# Altium PCB TheBetterArduinoBoard.PcbDoc
Units mm, origin at the board's own origin, x right, y up, seen from the top; angles counter-clockwise.
Board outline 92.5 x 45 mm, 2 copper layers (Top Layer, Bottom Layer), stack 1.569 mm thick; 56 components, 48 nets, 221 pads, 910 vias.
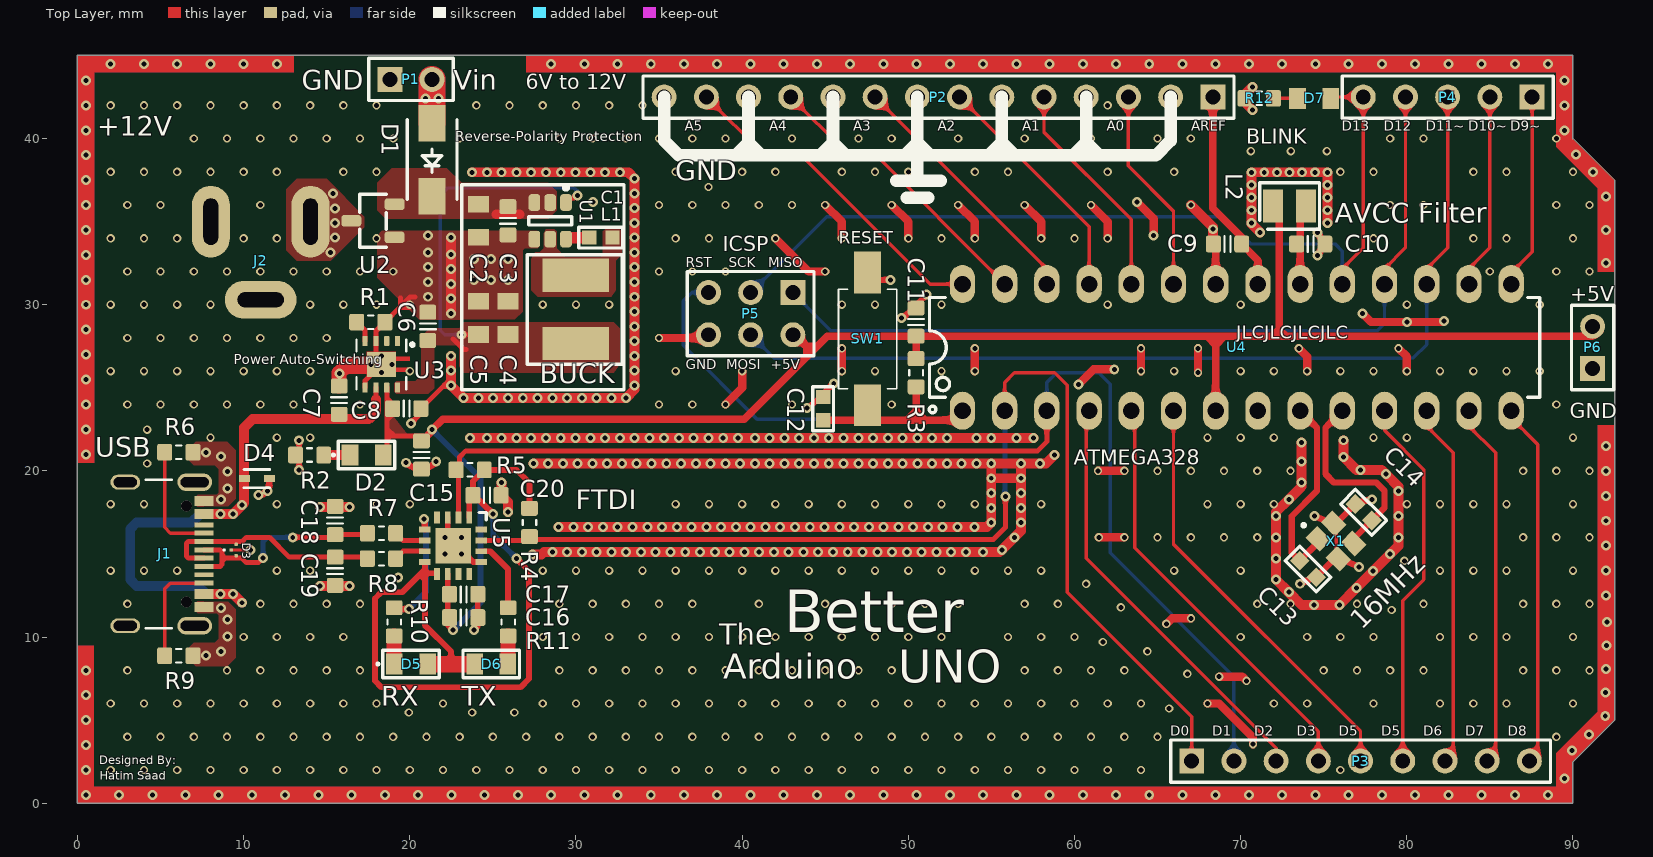
[diagram p0: Top Layer view]
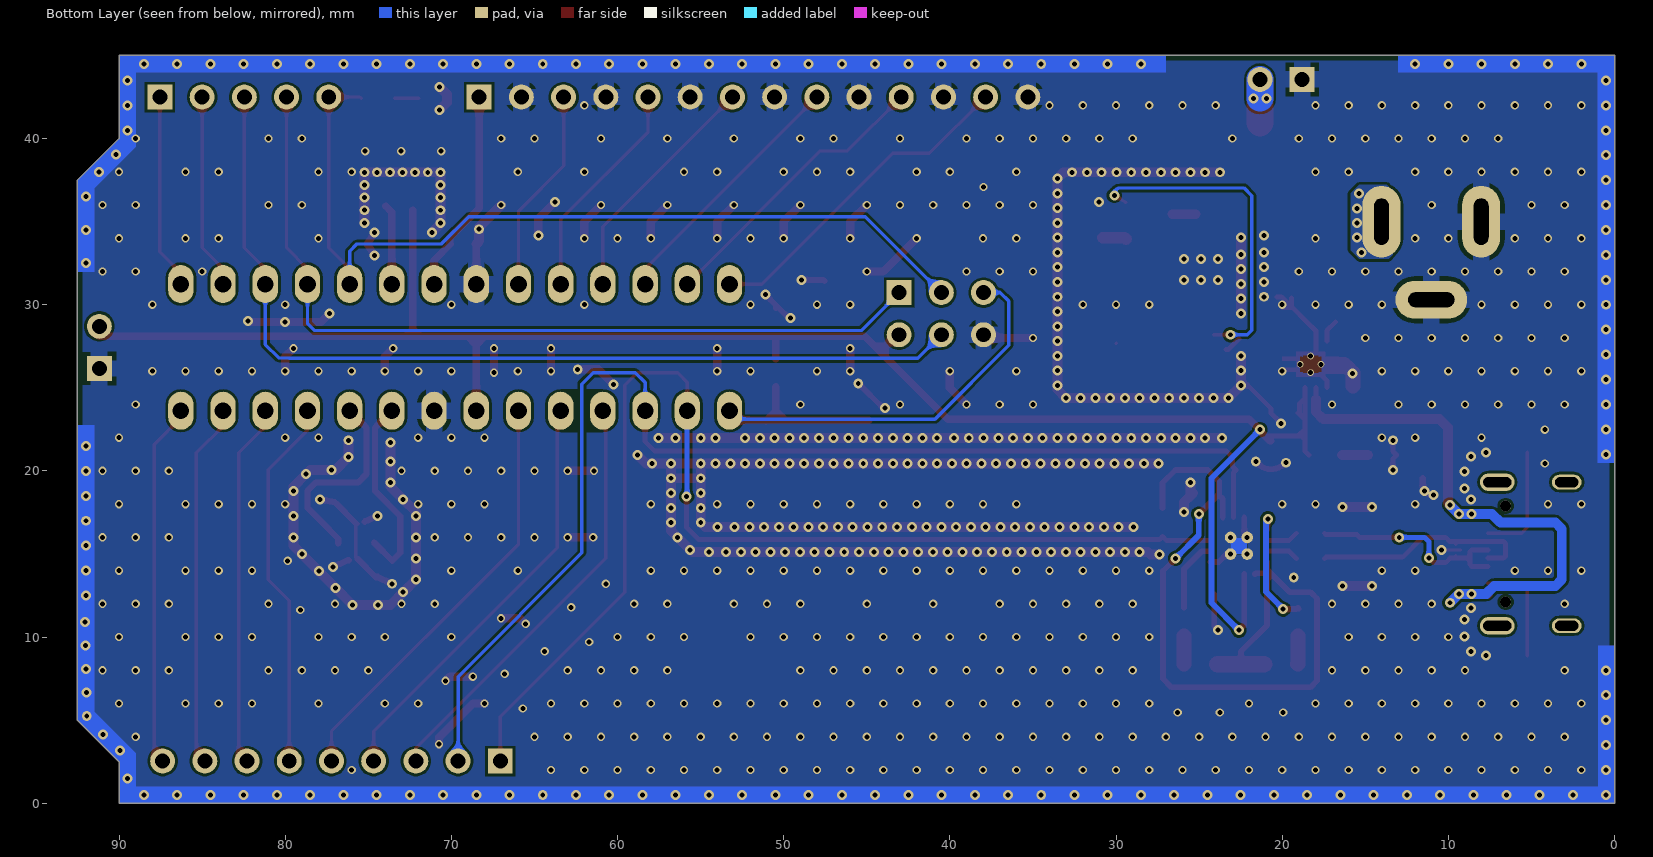
[diagram p1: Bottom Layer view, seen from below]
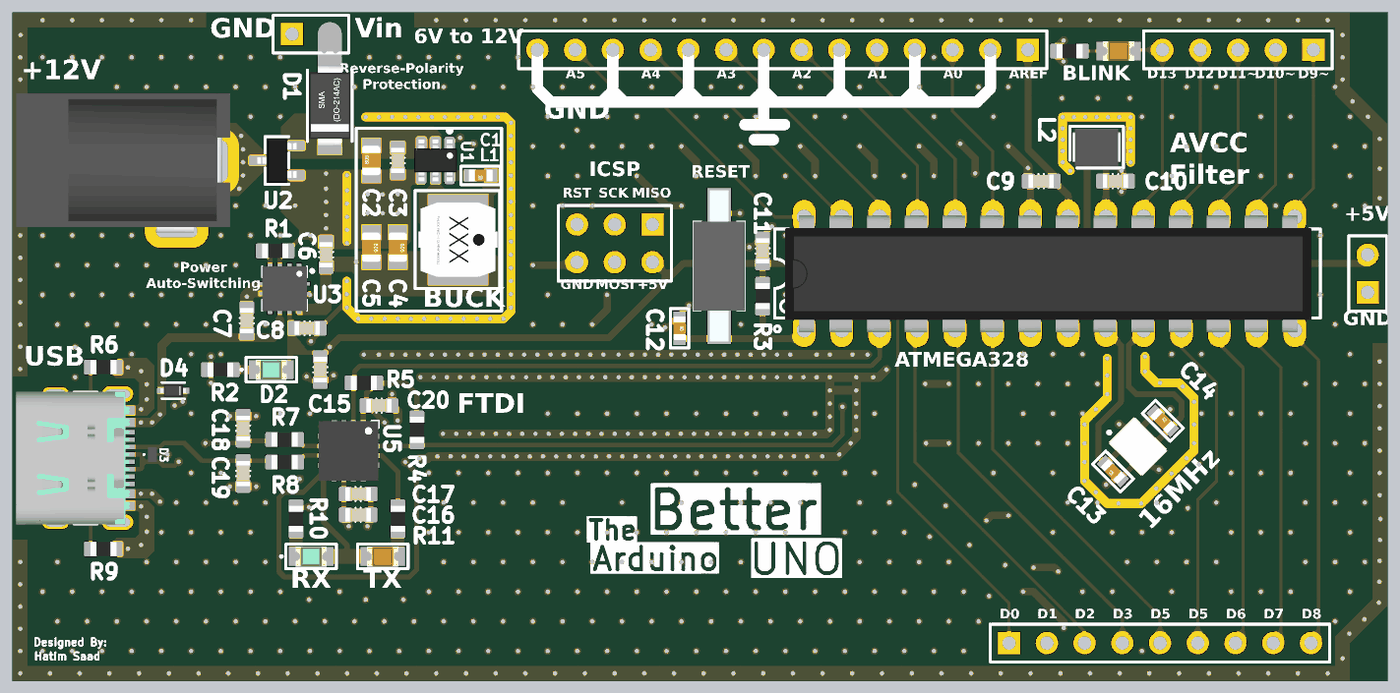
[diagram p2: 3D render of the assembled board from above, using the file's embedded part models]

## Layer stack, top to bottom
Top Solder: solder mask 0.0254, SM-001, Dk 4
Top Layer: signal copper 0.035
Dielectric 1: core 1.4986, Core-043, Dk 4.3
Bottom Layer: signal copper 0.035
Bottom Solder: solder mask 0.0254, SM-001, Dk 4

## Board outline
90,0 90,2.5 92.5,5 92.5,37.5 90,40 90,45 0,45 0,0

## Design rules (kind name [scope] priority, off if disabled: settings)
BoardOutlineClearance [All] p1: gap=0.3 ignorepadtopadclearanceinfootprint=FALSE
Clearance [All] p1: gap=0.3 ignorepadtopadclearanceinfootprint=TRUE except(0.127: Arc-Arc Arc-Track Track-Track SMDPad-SMDPad; 0.152: Arc-SMDPad Arc-THPad Arc-Poly Track-SMDPad Track-THPad Track-Poly SMDPad-Poly THPad-Poly Via-Fill Via-Poly Fill-Poly Poly-Poly Poly-Region Poly-Text Poly-Hole; 0.254: Arc-Via Track-Via Via-Via; 0.5: THPad-THPad)
DiffPairsRouting [All] p1: maxlimit=0.254 minlimit=0.127 mostfreqgap=0.254 toplayer_minwidth=0.127 toplayer_maxwidth=0.381 toplayer_prefwidth=0.381 bottomlayer_minwidth=0.127 bottomlayer_maxwidth=0.381 bottomlayer_prefwidth=0.381 maxuncoupledlength=12.7
FabricationTestpoint [All] p1: side=3 testpointundercomponent=TRUE minsize=1.016 maxsize=2.54 preferedsize=1.524 minholesize=0 maxholesize=1.016 preferedholesize=0.813 testpointgrid=0.025 allowsidetop=TRUE allowsidebottom=TRUE usegrid=TRUE gridtolerance=0 boardedgeclearance=0.3
Height [All] p1: minheight=0 maxheight=50 prefheight=12.7
HoleSize [All] p1: absolutevalues=TRUE maxlimit=6.3 minlimit=0.3 maxpercent=80.000 minpercent=20.000
PolygonConnect [All] p1: thpad.connectstyle=Relief thpad.reliefconductorwidth=1.016 thpad.reliefentries=4 thpad.polygonreliefangle="90 Angle" thpad.airgapwidth=0.254 smdpad.connectstyle=Relief smdpad.reliefconductorwidth=0.254 smdpad.reliefentries=4 smdpad.polygonreliefangle="90 Angle" smdpad.airgapwidth=0.254 via.connectstyle=Direct via.reliefconductorwidth=0.254 via.reliefentries=4 via.polygonreliefangle="90 Angle" via.airgapwidth=0.254
RoutingVias [All] p1: holewidth=0.711 width=1.27 viastyle="Through Hole" minholewidth=0.3 minwidth=0.5 maxholewidth=0.711 maxwidth=1.27
SolderMaskExpansion [All] p1: expansion=0.05 istentingtop=FALSE useseparateexpansions=TRUE expansionbottom=0.05 istentingbottom=FALSE
UnRoutedNet [All] p1: checkbadconnections=TRUE
Width [All] p1: maxlimit=15 minlimit=0.127 preferedwidth=0.254
25 further rules are at their usual default settings.

## Classes and differential pairs
component class Connectors_USB: C15 C16 C17 C18 C19 C20 D3 D4 D5 D6 J1 J2 P1 P2 P3 P4 P5 P6 R4 R5 R6 R7 R8 R9 R10 R11 U5
component class Power: C1 C2 C3 C4 C5 C6 C7 C8 D1 D2 L1 R1 R2 U1 U2 U3
component class Main: C9 C10 C11 C12 C13 C14 D7 L2 R3 R12 SW1 U4 X1
differential pair XTAL: +XTAL_P -XTAL_N
differential pair D: +D_P -D_N

## Components (designator, comment, footprint, x,y, rotation, side; value= is the part's Value field where it differs from the comment)
C1 "0.1UF" "CAP: 0603" 31.496,34.036 r180 top
C2 "10UF" "CAP: 0805" 24.13,35.052 r90 top
C3 "0.1UF" CAPC1608X90N#1 25.908,35.052 r90 top
C4 "22UF" "CAP: 0805" 25.908,29.21 r270 top
C5 "22UF" "CAP: 0805" 24.13,29.21 r270 top
C6 "0.1UF" CAPC1608X90N#2 21.082,28.702 r270 top
C7 "0.1UF" CAPC1608X90N#1 15.748,24.257 r270 top
C8 "0.1UF" CAPC1608X90N#2 19.812,23.749 r180 top
C9 "0.1UF" CAPC1608X90N#1 69.215,33.655 r180 top
C10 "0.1UF" CAPC1608X90N#1 74.215,33.655 r0 top
C11 "0.1UF" CAPC1608X90N#1 50.466,28.956 r90 top
C12 "0.1UF" "CAP: 0603" 44.878,23.749 r270 top
C13 "8PF" "CAP: 0603" 74.05,14.097 r135 top
C14 "8PF" "CAP: 0603" 77.403,17.513 r315 top
C15 "4.7UF" CAPC1608X90N#1 20.701,20.955 r90 top
C16 "100nF" CAPC1608X90N#1 23.241,11.176 r180 top
C17 "10nF" CAPC1608X90N#1 23.241,12.573 r180 top
C18 "47pF" CAPC1608X90N#1 15.502,17.01 r270 top
C19 "47pF" CAPC1608X90N#1 15.502,13.962 r90 top
C20 "100nF" CAPC1608X90N#1 24.646,18.534 r180 top
D1 "B340AQ-13-F" DO-214AC 21.336,38.735 r90 top
D2 "GREEN" "LED: 0805G" 17.399,20.955 r0 top
D3 "ESD122DMXR" "3-X2SON (1x0.6)" 9.398,15.24 r0 top
D4 "TPD1E10B06DYARQ1" SOD-523 10.795,19.558 r0 top
D5 "GREEN" "LED: 0805G" 20.074,8.374 r0 top
D6 "RED" "LED: 0805R" 24.9,8.374 r180 top
D7 "Yellow" "LED: 0805Y" 74.422,42.418 r0 top
J1 "12402012E212A" AMPHENOL_12402012E212A 2.875,15 r270 top
J2 "DCJ200-10-A-K1-K" "DC JACK" 14.025,35 r90 top
L1 "4.7UH" "IND: VLS5045EX-4R7M-H" 29.972,29.718 r270 top
L2 "10UH" "IND: 1210" 72.945,35.941 r180 top
P1 "Header 2" HDR1X2 18.796,43.561 r0 top
P2 "Header 14" HDR1X14 68.326,42.5 r180 top
P3 "Header 9" HDR1X9 67.056,2.54 r0 top
P4 "Header 5" HDR1X5 87.54,42.5 r180 top
P5 "Header 3X2" HDR2X3 43.053,30.734 r180 top
P6 "Header 2" HDR1X2 91.186,26.162 r90 top
R1 "240" RESC1608X55N 17.653,28.956 r180 top
R2 "470" RESC1608X55N 13.97,20.955 r0 top
R3 "10K" RESC1608X55N 50.466,25.908 r90 top
R4 "10k" RESC1608X55N 27.2,16.899 r90 top
R5 "10k" RESC1608X55N 23.63,20.058 r0 top
R6 "5.1K" RESC1608X55N 6.096,21.124 r0 top
R7 "27" RESC1608X55N 18.296,16.248 r0 top
R8 "27" RESC1608X55N 18.296,14.724 r0 top
R9 "5.1K" RESC1608X55N 6.096,8.876 r0 top
R10 "220" RESC1608X55N 19.058,10.914 r270 top
R11 "220" RESC1608X55N 25.916,10.914 r270 top
R12 "470" RESC1608X55N 71.12,42.418 r0 top
SW1 "SPST" MJTP1106STRB 47.545,27.94 r270 top
U1 "AP63205WU-7" TSOT23-6 28.448,35.052 r270 top
U2 "PMV28XPEAR" SOT23_3 17.78,35.052 r180 top
U3 "TPS2115ADRBR" "8-SON (3x3)" 18.288,26.416 r270 top
U4 "ATMEGA328-PU" dip_28 69.77,27.432 r90 top
U5 "FT230XQ-R" "16-QFN (4x4)" 22.606,15.494 r270 top
X1 "16MHz" "4-SMD, No Lead" 75.739,15.773 r315 top

## Footprints (in the part's own frame and the unit in brackets; to place one, negate y for a bottom-side part, rotate by r counter-clockwise, add the part's x,y. Pads: shape width x height; smd on the part's side, far side on the other; paste and mask are expansions set on the pad)
"3-X2SON (1x0.6)" [mm]
  rrect50% 0.2x0.2 smd paste-1 mask+0.05: 1(-0.15,0) 2(0.15,-0.34) 3(0.15,0.34)
  silkscreen extent -0.62,-0.05 -0.52,0.05, body extent -0.3,-0.5 0.3,0.5, height 0.4
"4-SMD, No Lead" [mm]
  rect 1.2x1 smd mask+0.05: 1(-0.85,-0.65) 2(0.85,-0.65) 3(0.85,0.65) 4(-0.85,0.65)
  silkscreen extent -2.15,-0.8 -1.95,-0.6, body extent -1.6,-1.25 1.6,1.25, height 0.8
"8-SON (3x3)" [mm]
  rrect25% 0.6x0.31 smd mask+0.05: 1(-1.4,0.975) 2(-1.4,0.325) 3(-1.4,-0.325) 4(-1.4,-0.975) 5(1.4,-0.975) 6(1.4,-0.325) 7(1.4,0.325) 8(1.4,0.975)
  round 0.4 hole 0.3 mask+0.05: 9(-0.5,0) 9(0,0.625) 9(0,-0.625) 9(0.5,0)
  rect 1.5x1.75 smd paste-2 mask+0.05: 9(0,0)
  Top Layer region: 0.44,0.875 0.75,0.875 0.75,-0.875 0.44,-0.875 0.44,-1.7 0.21,-1.7 0.21,-0.875 -0.21,-0.875 -0.21,-1.7 -0.44,-1.7 -0.44,-0.875 -0.75,-0.875 -0.75,0.875 -0.44,0.875 -0.44,1.7 -0.21,1.7 -0.21,0.875 0.21,0.875 0.21,1.7 0.44,1.7
  silkscreen extent -1.5,-1.5 1.5,1.96, body extent -1.5,-1.5 1.5,1.5, height 1
"16-QFN (4x4)" [mm] "4x4 mm, pitch 0.65 mm"
  round 0.7 hole 0.3 mask+0.05: 0(-0.5,0.5) 0(-0.5,-0.5) 0(0.5,0.5) 0(0.5,-0.5)
  rect 2.15x2.15 smd mask+0.05: 0(0,0)
  rect 0.7x0.35 smd mask+0.05: 1(-1.7,0.975) 2(-1.7,0.325) 3(-1.7,-0.325) 4(-1.7,-0.975) 9(1.7,-0.975) 10(1.7,-0.325) 11(1.7,0.325) 12(1.7,0.975)
  rect 0.35x0.7 smd mask+0.05: 5(-0.975,-1.7) 6(-0.325,-1.7) 7(0.325,-1.7) 8(0.975,-1.7) 13(0.975,1.7) 14(0.325,1.7) 15(-0.325,1.7) 16(-0.975,1.7)
  round 0.5 on Mech1 mask+0.05: ""(-1.5,1.6)
  silkscreen extent -2,1.57 -1.57,2, body extent -2,-2 2,2, height 0.75
AMPHENOL_12402012E212A [mm]
  rect 0.6x1.14 smd mask+0.05: A1_B12(-3.2,4.75) A4_B9(-2.4,4.75) B1_A12(3.2,4.75) B4_A9(2.4,4.75)
  rect 0.3x1.14 smd mask+0.05: A5(-1.25,4.75) A6(-0.25,4.75) A7(0.25,4.75) A8(1.25,4.75) B5(1.75,4.75) B6(0.75,4.75) B7(-0.75,4.75) B8(-1.75,4.75)
  oval 1.05x2.1 hole 0.6 slot 1.7 at 90 deg: SH1(-4.32,4.18) SH2(4.32,4.18)
  oval 0.9x1.8 hole 0.6 slot 1.4 at 90 deg: SH3(-4.32,0) SH4(4.32,0)
  round 0.65 hole 0.65 unplated mask+0.05: ""(-2.89,3.68) ""(2.89,3.68)
  silkscreen extent -4.47,1.22 4.47,2.81, body extent -4.47,-2.65 4.47,4.95, height 3.23
"CAP: 0603" [mm]
  rect 0.85x0.85 smd mask+0.05: 1(-0.7,0) 2(0.7,0)
  silkscreen extent -1.33,-0.63 1.33,0.63, body extent -0.8,-0.4 0.8,0.4, height 0.3
"CAP: 0805" [mm]
  rect 1x1.25 smd mask+0.05: 1(-1,0) 2(1,0)
  body extent -1,-0.62 1,0.63, height 0.78
CAPC1608X90N#1 [mm] "Chip Capacitor, Body 1.6x0.8mm, EIA 0603, IPC Medium Density"
  rrect25% 0.9x1 smd mask+0.05: 1(-0.85,0) 2(0.85,0)
  Top Layer pour cut-out: -0.6,0.5 -0.4,0.7 0.4,0.7 0.6,0.5 0.6,-0.5 0.4,-0.7 -0.4,-0.7 -0.6,-0.5
  silkscreen extent -0.18,-0.48 0.18,0.48, body extent -0.85,-0.45 0.85,0.45, height 0.89
CAPC1608X90N#2 [mm] "Chip Capacitor, Body 1.6x0.8mm, EIA 0603, IPC Medium Density"
  rrect25% 0.9x1 smd mask+0.05: 1(-0.85,0) 2(0.85,0)
  silkscreen extent -0.18,-0.48 0.18,0.48, body extent -0.85,-0.45 0.85,0.45, height 0.89
"DC JACK" [mil]
  oval 170x90 hole 35 slot 110 at 0 deg: 1(0,0) 2(0,236.22)
  oval 90x170 hole 35 slot 110 at 90 deg: 3(-185.04,118.11)
  body extent -190,-24 180,543, height 447
dip_28 [mil]
  oval 90x60 hole 39.37: 1(-150,650) 2(-150,550) 3(-150,450) 4(-150,350) 5(-150,250) 6(-150,150) 7(-150,50) 8(-150,-50) 9(-150,-150) 10(-150,-250) 11(-150,-350) 12(-150,-450) 13(-150,-550) 14(-150,-650) 15(150,-650) 16(150,-550) 17(150,-450) 18(150,-350) 19(150,-250) 20(150,-150) 21(150,-50) 22(150,50) 23(150,150) 24(150,250) 25(150,350) 26(150,450) 27(150,550) 28(150,650)
  silkscreen extent -155,-718 118,729, body extent -156,-694 154,700, height 205
DO-214AC [mm]
  rect 2.2x1.6 smd mask+0.05: 1(2.2,0) 2(-2.2,0)
  silkscreen extent -2.4,-1.5 2.4,1.5, body extent -2.75,-1.4 2.75,1.4, height 2.6
HDR1X2 [mm] "Connector; Header; 2 Position"
  rect 1.5x1.5 hole 0.9: 1(0,0)
  round 1.5 hole 0.9: 2(2.54,0)
  silkscreen extent -1.27,-1.27 3.81,1.27
HDR1X5 [mm] "Connector; Header; 5 Position"
  rect 1.5x1.5 hole 0.9: 1(0,0)
  round 1.5 hole 0.9: 2(2.54,0) 3(5.08,0) 4(7.62,0) 5(10.16,0)
  silkscreen extent -1.27,-1.27 11.43,1.27
HDR1X9 [mm] "Connector; Header; 9 Position"
  rect 1.5x1.5 hole 0.9: 1(0,0)
  round 1.5 hole 0.9: 2(2.54,0) 3(5.08,0) 4(7.62,0) 5(10.16,0) 6(12.7,0) 7(15.24,0) 8(17.78,0) 9(20.32,0)
  silkscreen extent -1.27,-1.27 21.59,1.27
HDR1X14 [mm] "Connector; Header; 14 Position"
  rect 1.5x1.5 hole 0.9: 1(0,0)
  round 1.5 hole 0.9: 2(2.54,0) 3(5.08,0) 4(7.62,0) 5(10.16,0) 6(12.7,0) 7(15.24,0) 8(17.78,0) 9(20.32,0) 10(22.86,0) 11(25.4,0) 12(27.94,0) 13(30.48,0) 14(33.02,0)
  silkscreen extent -1.27,-1.27 34.29,1.27
HDR2X3 [mm] "Connector; Header; 3x2 Position"
  rect 1.5x1.5 hole 0.9: 1(0,0)
  round 1.5 hole 0.9: 2(0,2.54) 3(2.54,0) 4(2.54,2.54) 5(5.08,0) 6(5.08,2.54)
  silkscreen extent -1.27,-1.27 6.35,3.81
"IND: 1210" [mm]
  rect 1.2x2 smd mask+0.05: 1(-1,0) 2(1,0)
  silkscreen extent -1.8,-1.39 1.8,1.4, body extent -1.6,-1.25 1.6,1.25, height 2.4
"IND: VLS5045EX-4R7M-H" [mm]
  rect 2x4 smd mask+0.05: 1(-2.05,0) 2(2.05,0)
  silkscreen extent -3.3,-2.9 3.3,2.8, body extent -2.49,-2.66 2.51,2.64, height 4.35
"LED: 0805G" [mm]
  rect 1x1.25 smd mask+0.05: 1(-1,0) 2(1,0)
  silkscreen extent -2.03,-0.82 1.7,0.82, body extent -1.05,-0.67 1.05,0.68, height 0.9
"LED: 0805R" [mm]
  rect 1x1.25 smd mask+0.05: 1(-1,0) 2(1,0)
  silkscreen extent -1.7,-0.82 1.7,0.82, body extent -1.05,-0.67 1.05,0.68, height 0.9
"LED: 0805Y" [mm]
  rect 1x1.25 smd mask+0.05: 1(-1,0) 2(1,0)
  body extent -1.05,-0.67 1.05,0.68, height 0.9
MJTP1106STRB [mm]
  rect 2.5x1.6 smd mask+0.05: 1(-4,0) 2(4,0)
  silkscreen extent -3,-1.75 3,1.75, body extent -5.09,-1.75 5.09,1.75, height 4.4
RESC1608X55N [mm] "Chip Resistor, Body 1.6x0.8mm, EIA 0603, IPC Medium Density"
  rrect25% 0.9x1 smd mask+0.05: 1(-0.85,0) 2(0.85,0)
  Top Layer pour cut-out: -0.6,0.5 -0.4,0.7 0.4,0.7 0.6,0.5 0.6,-0.5 0.4,-0.7 -0.4,-0.7 -0.6,-0.5
  silkscreen extent -0.15,-0.41 0.15,0.41, body extent -0.87,-0.47 0.88,0.48, height 0.54
SOD-523 [mm]
  rect 0.67x0.4 smd paste+0 mask+0.05: 1(-0.749,-0.019) 2(0.749,-0.019)
  silkscreen extent -0.77,-0.57 0.77,0.53, body extent -0.85,-0.44 0.85,0.4, height 0.77
SOT23_3 [mm]
  rrect50% 1.2x0.7 smd mask+0.05: 1(-1.3,1) 2(-1.3,-1) 3(1.3,0)
  silkscreen extent -0.8,-1.6 0.8,1.6, body extent -1.32,-1.5 1.32,1.5, height 1.08
TSOT23-6 [mm] "pitch 0.95 mm"
  rrect50% 1x0.7 smd mask+0.05: 1(-1.099,0.95) 2(-1.099,0) 3(-1.099,-0.95) 4(1.099,-0.95) 5(1.099,0) 6(1.099,0.95)
  round 0.5 on Mech1 mask+0.05: ""(-1,1.1)
  silkscreen extent -2.12,-1.3 0.25,1.3, body extent -1.4,-1.45 1.4,1.45, height 1.45

## Part data
C1: library part CL10B104KB8NNNL, "CAP CER 0.1UF 50V X7R 0603", Supplier Part Number 1=187-CL10B104KB8NNNL, Supplier 1=Mouser
C2: library part GRM21BR61H106KE43L, "CAP CER 10UF 50V X5R 0805", Supplier Part Number 1=81-GRM21BR61H106KE3L, Supplier 1=Mouser
C3 C6 C7 C8 C9 C10 C11 C12: library part CC0603KRX7R9BB104, "CAP CER 0.1UF 50V 10% X7R 0603", Supplier Part Number 1=311-1344-1-ND, Supplier 1=Digi-Key
C4 C5: library part CL21A226MAYNNNE, "CAP CER 22UF 25V X5R 0805", Supplier Part Number 1=187-CL21A226MAYNNNE, Supplier 1=Mouser
C13 C14: library part CC0603DRNPO9BN8R0, "CAP CER 8PF 50V C0G/NPO 0603", Supplier Part Number 1=603-CC603DRNPO9BN8R0, Supplier 1=Mouser
C15: library part 1276-1903-6-ND, "CAP CER 4.7UF 25V X5R 0603", Supplier Part Number 1=1276-1903-1-ND, Supplier 1=Digi-Key
C16 C20: library part C14663, "CAP CER 0.1UF 50V 10% X7R 0603"
C17: library part 1292-1386-6-ND, "CAP CER 10000PF 50V X7R 0603", Supplier Part Number 1=1292-1386-1-ND, Supplier 1=Digi-Key
C18 C19: library part 311-3899-6-ND, "CAP CER 47PF 50V C0G/NPO 0603", Supplier Part Number 1=311-3899-1-ND, Supplier 1=Digi-Key
D1: "DIODE SCHOTTKY 40V 3A SMA TR 5K", Supplier Part Number 1=621-B340AQ-13-F, Supplier 1=Mouser
D2 D5: library part 732-4983-6-ND, "LED GREEN CLEAR 0805 SMD", Supplier Part Number 1=732-4983-1-ND, Supplier 1=Digi-Key
D3: "TVS DIODE 3.6VWM 8.4VC 3X2SON", Supplier Part Number 1=595-ESD122DMXR, Supplier 1=Mouser
D4: "14V (Typ) Clamp 6A (8/20µs) Ipp Tvs Diode Surface Mount SOT-5X3", Supplier Part Number 1=595-TPD1E10B06DYARQ1, Supplier 1=Mouser
D6: library part 732-4985-6-ND, "LED RED CLEAR 0805 SMD", Supplier Part Number 1=732-4985-1-ND, Supplier 1=Digi-Key
D7: library part 150080YS75000, "LED YELLOW CLEAR 0805 SMD", Supplier Part Number 1=710-150080YS75000, Supplier 1=Mouser
J1: "CONN RCP USB2.0 TYP C 24P SMD RA", Supplier Part Number 1=523-12402012E212A, Supplier 1=Mouser
J2: library part 2073-DCJ200-10-A-K1-K-ND, "Power Barrel Connector Jack 2.05mm ID (0.081\"), 5.50mm OD (0.217\") Through Hole, Right Angle", Supplier Part Number 1=75Y6644, Supplier 1=Newark
L1: library part VLS5045EX-4R7M-H, "FIXED IND 4.7UH 3.2A 46.8MOHM SM", Supplier Part Number 1=810-VLS5045EX-4R7M-H, Supplier 1=Mouser
L2: library part NLFV32T-100K-EF, "FIXED IND 10UH 250MA 240MOHM SMD", Supplier Part Number 1=810-NLFV32T-100K-EF, Supplier 1=Mouser
P1 P6: "Header, 2-Pin", LatestRevisionDate=17-Jul-2002, LatestRevisionNote="Re-released for DXP Platform.", Publisher="Altium Limited"
P2: "Header, 14-Pin", LatestRevisionDate=17-Jul-2002, LatestRevisionNote="Re-released for DXP Platform.", Publisher="Altium Limited"
P3: "Header, 9-Pin", LatestRevisionDate=17-Jul-2002, LatestRevisionNote="Re-released for DXP Platform.", Publisher="Altium Limited"
P4: "Header, 5-Pin", LatestRevisionDate=17-Jul-2002, LatestRevisionNote="Re-released for DXP Platform.", Publisher="Altium Limited"
P5: "Header, 3-Pin, Dual row", LatestRevisionDate=17-Jul-2002, LatestRevisionNote="Re-released for DXP Platform.", Publisher="Altium Limited"
R1: library part RMCF0603JT240RDKR-ND, "RES 240 OHM 5% 1/10W 0603", Supplier Part Number 1=RMCF0603JT240RCT-ND, Supplier 1=Digi-Key
R2 R12: library part 541-4055-6-ND, "RES 470 OHM 5% 1/10W 0603", Supplier Part Number 1=541-4055-1-ND, Supplier 1=Digi-Key
R3: library part RC0603FR-0710KL, "RES SMD 10K OHM 1% 1/10W 0603", Supplier Part Number 1=603-RC0603FR-0710KL, Supplier 1=Mouser
R4 R5: library part RC0603FR-0710KL, "RES SMD 10K OHM 1% 1/10W 0603", Supplier Part Number 1=311-10.0KHRCT-ND, Supplier 1=Digi-Key
R6 R9: library part 541-CRCW06035K10FKEBCDKR-ND, "RES 5.1K OHM 1% 1/10W 0603", Supplier Part Number 1=541-CRCW06035K10FKEBCCT-ND, Supplier 1=Digi-Key
R7 R8: library part CR0603-FX-27R0ELFDKR-ND, "RES SMD 27 OHM 1% 1/10W 0603", Supplier Part Number 1=CR0603-FX-27R0ELFCT-ND, Supplier 1=Digi-Key
R10 R11: library part 311-220HRDKR-ND, "RES SMD 220 OHM 1% 1/10W 0603", Supplier Part Number 1=311-220HRCT-ND, Supplier 1=Digi-Key
SW1: library part MJTP1106STR, "SWITCH TACTILE SPST-NO 0.05A 12V", Supplier Part Number 1=679-2395-1-ND, Supplier 1=Digi-Key
U1: "IC REG BUCK 5V 2A TSOT26", Supplier Part Number 1=621-AP63205WU-7, Supplier 1=Mouser
U2: "P-Channel 20 V 5A (Ta) 610mW (Ta), 8.3W (Tc) Surface Mount TO-236AB", Supplier Part Number 1=771-PMV28XPEAR, Supplier 1=Mouser
U3: "OR Controller Source Selector Switch N-Channel 2:1 8-SON (3x3)", Supplier Part Number 1=595-TPS2115ADRBR, Supplier 1=Mouser
U4: "AVR AVR® ATmega Microcontroller IC 8-Bit 20MHz 32KB (16K x 16) FLASH 28-PDIP", Supplier Part Number 1=556-ATMEGA328-PU, Supplier 1=Mouser
U5: "USB Bridge, USB to UART USB 2.0 UART Interface 16-QFN (4x4)", Supplier Part Number 1=895-FT230XQ-R, Supplier 1=Mouser
X1: library part ECS-160-10-36-CKM-TR3, "CRYSTAL 16.0000MHZ 10PF SMD", Supplier Part Number 1=520-160-10-36CKM-TR3, Supplier 1=Mouser

## Via types
v1: diameter 0.5, hole 0.3, Top Layer to Bottom Layer, tented both sides, 474 vias
v2: diameter 0.6, hole 0.3, Top Layer to Bottom Layer, tented both sides, 436 vias

## Nets (pads, with @x,y where several pads share a name; then routed paths per layer and width w, separated by ;. In a path a pad name is that pad's centre, name@x,y a point inside that pad or via, vN(x,y) a via of type N, cw(c..) or ccw(c..) an arc to the next point about the centre after c; other vN are vias at no path point)
+5: C8.2 C11.1 C15.2 C16.2 C17.2 D2.2 L2.2 P5.2 P6.2 R3.2 U3.7 U4.7 U5.10 | length 120.9
  Top Layer w0.3: D2.2 18.613,21.169 18.613,22.098 ; U3.7 18.613,24.384 ; 18.624,21.877 18.624,21.89 18.832,22.098 ; C8.2@19.05,23.495 18.613,23.058 ; C15.2@20.955,22.098 19.05,22.098 ; 18.613,22.098 18.832,22.098 ; 18.613,22.098 18.613,22.535 ; 18.613,22.535 18.613,23.058 ; 18.613,22.535 19.05,22.098 ; 18.613,23.058 18.613,23.082 ; 18.613,23.082 18.613,24.384 ; 18.613,23.082 18.962,23.431 C8.2 18.962,24.035 18.613,24.384 ; 18.832,22.098 19.05,22.098
  Top Layer w0.35: U5.10 22.281,10.739 v2(22.606,10.414)
  Top Layer w0.45: C15.2 20.737,21.805 v2@21.374,22.441 ; v2(21.336,22.479) 21.971,23.114 40.132,23.114 43.942,26.924 ; P5.2@43.141,28.106 P5.2 43.18,28.194 43.879,27.496 ; 44.387,27.496 43.879,27.496 ; R3.2 C11.1 ; 68.496,27.551 69.004,28.106 ; U4.7 68.5,27.551 ; 68.5,28.067 68.5,27.551 ; 72.31,28.702 72.31,28.534 ; L2.2@72.31,35.687 72.31,28.534 ; P6.2 90.59,28.106 ; P6.2@91.191,28.229 P6.2@91.067,28.106 ; P6.2@91.655,28.471 91.448,28.264 cw(c91.067,28.644) P6.2@91.067,28.106 ; 43.879,27.496 44.196,27.178 ; 43.879,27.496 43.879,26.987 43.942,26.924 ; 43.942,26.924 44.196,27.178 ; 44.196,27.178 45.124,28.106 C11.1 ; C11.1 67.992,28.106 ; 67.992,28.106 69.004,28.106 ; 67.992,28.106 68.5,27.551 ; 69.004,28.106 71.882,28.106 ; 71.882,28.106 72.263,28.106 ; 71.882,28.106 72.31,28.534 ; 72.263,28.106 72.738,28.106 ; 72.263,28.106 72.31,28.153 72.31,28.534 ; 72.31,28.534 72.738,28.106 ; 72.738,28.106 90.59,28.106 ; 90.59,28.106 P6.2@91.067,28.106
  Bottom Layer w0.35: v2(21.336,22.479) 24.257,19.558 24.257,12.065 v2(22.606,10.414)
+12: C2.2 C3.2 D1.2 U1.2 U1.3 U2.2 | length 1.4
  Top Layer w0.559: 25.208,35.452 26.608,35.452
A0: P2.3 U4.23 | length 12.4
  Top Layer w0.203: P2.3 63.246,38.354 65.96,35.64 U4.23
A1: P2.5 U4.24 | length 13.4
  Top Layer w0.203: P2.5 58.166,40.386 63.42,35.132 U4.24
A2: P2.7 U4.25 | length 14.5
  Top Layer w0.203: P2.7 60.88,34.706 U4.25
A3: P2.9 U4.26 | length 15.5
  Top Layer w0.203: P2.9 58.34,32.166 U4.26
A4: P2.11 U4.27 | length 17.5
  Top Layer w0.203: P2.11 46.172,39.254 47.788,39.254 U4.27
A5: P2.13 U4.28 | length 20.1
  Top Layer w0.203: P2.13 41.23,39.116 43.434,39.116 51.308,31.242 U4.28
AREF: C9.1 P2.1 U4.21 | length 12.5
  Top Layer w0.45: P2.1 68.326,35.814 70.104,34.036 C9.1@70.104,33.782 ; C9.1 71.04,32.68 U4.21 U4.21@70.874,31.408
AVCC: C10.1 L2.1 U4.20 | length 4.9
  Top Layer w0.45: U4.20 73.58,35.576 L2.1
BLINK: D7.1 R12.2 | length 1.5
  Top Layer w0.203: R12.2 D7.1
BST: C1.2 U1.6 | length 1.4
  Top Layer w0.7: U1.6 29.482,34.036 C1.2
CBUS2: R10.1 U5.5 | length 7.6
  Top Layer w0.35: R10.1@19.001,11.707 R10.1 19.138,11.684 v2(19.939,11.684) ; v2(20.855,17.118) 20.906,17.067 U5.5
  Bottom Layer w0.35: v2(19.939,11.684) 20.978,12.723 20.978,16.995 v2(20.855,17.118)
CBUS3: R11.1 U5.14 | length 4.4
  Top Layer w0.35: U5.14 24.836,15.169 25.916,14.089 R11.1
CC1_A: J1.A5 R6.1 | length 7
  Top Layer w0.203: R6.1 5.246,16.598 5.594,16.25 J1.A5
CC1_B: J1.B5 R9.1 | length 6.5
  Top Layer w0.203: R9.1 5.246,12.902 5.594,13.25 J1.B5
D2: P3.3 U4.4 | length 25.9
  Top Layer w0.203: U4.4 60.706,23.448 60.706,14.732 72.136,3.302 P3.3
"D3 (PWM)": P3.4 U4.5 | length 25.7
  Top Layer w0.203: U4.5 63.627,23.415 63.627,15.367 74.676,4.318 P3.4
D4: P3.5 U4.6 | length 25.7
  Top Layer w0.203: U4.6 65.96,15.574 77.216,4.318 P3.5
D5: P3.6 U4.11 | length 22.8
  Top Layer w0.203: U4.11 78.66,22.432 81.026,20.066 81.026,13.462 79.756,12.192 P3.6 P3.6@80.01,2.54
D6: P3.7 U4.12 | length 22.1
  Top Layer w0.203: U4.12 81.2,22.686 82.804,21.082 82.804,2.794 82.55,2.54 P3.7
D7: P3.8 U4.13 | length 22.1
  Top Layer w0.203: U4.13 83.74,22.686 85.344,21.082 85.344,2.794 85.09,2.54 P3.8
D8: P3.9 U4.14 | length 22.1
  Top Layer w0.203: U4.14 86.28,23.194 87.884,21.59 87.884,2.794 87.63,2.54 P3.9
"D9 (PWM)": P4.1 U4.15 | length 11.8
  Top Layer w0.203: U4.15 86.28,31.924 87.54,33.184 P4.1
"D10 (PWM)": P4.2 U4.16 | length 11.8
  Top Layer w0.203: U4.16 83.74,32.178 85,33.438 P4.2
"D11 (PWM)": P4.3 P5.4 U4.17 | length 57
  Top Layer w0.203: U4.17 81.2,32.178 82.46,33.438 P4.3
  Bottom Layer w0.203: P5.4 41.936,26.771 79.251,26.771 79.753,26.771 79.778,26.797 80.391,26.797 81.2,27.606 U4.17
D12: P4.4 P5.1 U4.18 | length 50.9
  Top Layer w0.203: U4.18 78.66,32.178 79.92,33.438 P4.4
  Bottom Layer w0.203: P5.1 45.339,28.448 78.232,28.448 78.66,28.876 U4.18
D13: D7.2 P4.5 P5.3 U4.19 | length 54.1
  Top Layer w0.203: D7.2 75.504,42.5 P4.5 77.38,33.438 76.12,32.178 U4.19
  Bottom Layer w0.203: P5.3 45.085,35.306 68.961,35.306 70.612,33.655 75.692,33.655 76.12,33.227 U4.19
D_N: C19.2 D3.3 J1.A7 J1.B7 R8.1 | length 13.6
  Top Layer w0.203: 9.525,15.75 9.548,15.727 D3.3
  Top Layer w0.3: J1.A7 6.676,14.75 6.553,14.873 6.553,15.627 6.676,15.75 J1.B7 9.525,15.75 9.908,15.75 10.16,16.002 11.557,16.002 12.747,14.812 C19.2 17.358,14.812 R8.1
D_P: C18.2 D3.2 J1.A6 J1.B6 R7.1 | length 13.9
  Top Layer w0.203: 9.51,14.737 9.524,14.75 9.548,14.774 D3.2
  Top Layer w0.3: J1.B6 8.574,14.25 8.697,14.373 8.697,14.561 ; J1.A6 8.574,15.25 8.697,15.127 8.697,14.939 ; v2(11.158,14.75) 10.886,14.478 10.16,14.478 9.888,14.75 9.524,14.75 8.886,14.75 ; v2(12.954,16.002) 15.344,16.002 C18.2 17.358,16.16 R7.1 ; 8.697,14.561 8.697,14.75 ; 8.697,14.561 8.886,14.75 ; 8.697,14.75 8.886,14.75 ; 8.697,14.75 8.697,14.939 ; 8.697,14.939 8.886,14.75
  Bottom Layer w0.3: v2(11.158,14.75) 11.176,14.768 11.176,15.748 11.43,16.002 v2(12.954,16.002)
GND: C2.1 C3.1 C4.1 C5.1 C6.1 C7.1 C8.1 C9.2 C10.2 C11.2 C12.1 C13.1 C14.1 C15.1 C16.1 C17.1 C18.1 C19.1 C20.1 D3.1 D4.2 J1.A1_B12 J1.B1_A12 J2.2 J2.3 P1.1 P2.2 P2.4 P2.6 P2.8 P2.10 P2.12 P2.14 P5.6 P6.1 R1.1 R2.1 R6.2 R9.2 R12.1 SW1.1 U1.4 U2.1 U3.3 U3.5 U3.9 U4.8 U4.22 U5.0 U5.3 U5.13 X1.2 X1.4 | length 321
  Top Layer w0.152: D3.1 v2(10.414,15.24)
  Top Layer w0.203: X1.4 75.749,16.682 X1.2@75.749,14.791
  Top Layer w0.254: U5.13@24.271,14.554 U5.13 ; C20.1@25.496,18.285 C20.1
  Top Layer w0.3: v2(13.335,20.066) 13.335,20.74 R2.1 13.335,21.17 v2(13.335,21.844) ; U3.5 17.313,25.441 18.161,26.289 18.288,26.416 17.963,26.741 U3.3 17.963,28.416 R1.1 19.431,29.884 ; 19.431,30.392 19.431,29.884 ; v1@19.978,29.845 19.431,29.845 19.431,29.884 ; v2(20.066,22.86) 20.662,23.456 C8.1 22.015,25.102 ; 20.32,30.48 20.027,30.48 19.431,29.884 ; v2(22.479,25.146) 22.435,25.102 22.015,25.102 ; 22.479,25.566 22.015,25.102
  Top Layer w0.35: v2(19.767,20.492) ccw(c20.701,21.426) C15.1 ccw(c20.701,21.119) 21.418,20.402 v2(21.59,20.574) ; U5.3 22.281,15.819 U5.0@22.606,15.494 ; U5.0@23.106,14.994 23.36,14.994 23.835,14.519 ; U5.0@23.541,14.794 23.816,14.519 23.835,14.519 ; v2(23.876,10.414) 24.091,10.629 C16.1 C17.1 ; U5.13 23.835,14.519 ; v2@43.989,23.749 v2(45.513,25.273) ; SW1.1@47.545,31.432 47.609,31.496 v2(48.942,31.496) v2@48.878,31.432 ; v2(49.577,29.21) 49.704,29.21 C11.2@50.466,29.972 ; C11.2 C11.2@50.466,29.972 ; v2(51.101,30.607) C11.2@50.466,29.972
  Top Layer w0.381: C13.1 X1.2@75.643,14.7 ; X1.4@75.81,16.91 C14.1
  Top Layer w0.4: v2(10.887,18.542) ccw(c10.887,19.199) 11.544,19.199 D4.2 ; v2(73.58,13.208) C13.1@74.447,13.622 ; v2(74.459,17.285) X1.4@75.213,16.946 ; X1.2@76.188,14.628 v2(77.136,14.224) ; C14.1@77.022,18.113 v2(77.898,18.288)
  Top Layer w0.45: C9.2 C9.2@68.365,33.73 ; U4.22 C9.2@68.5,33.655 ; v2(74.615,32.955) C10.2@75.069,33.652 ; v2(74.615,34.345) C10.2
  Top Layer w0.5: v1(35,28) 37.779,28 P5.6 P5.6@37.973,27.973 ; v1(39,24) 40,25 v1(40,26) ; v1(42,34) 44,32 v1(45,32) ; v1(45,36) 46,35 v1(46,34) ; v1(46,26) v1(46,27.377) ; v1(49,36) 50,35 v1(50,34) ; v1(53,36) 54,35 v1(54,34) ; v1(54,26) v1(54,27.377) ; v1(57,36) 58,35 v1(58,34) ; v2(60.239,25.208) 61.147,26.116 v2(62.394,26.116) v2@62.375,26.135 ; v1(61,36) 62,35 v1(62,34) ; v1(61.412,20) v1(63,20) ; v1(61.468,16.002) 62.998,16.002 v1(63,16) ; v2(63.77,36.179) 64.77,35.179 v2(64.77,34.179) ; v1(64,26) v1(64,27.377) ; v1(65.532,10.795) 65.866,11.129 v1(67.009,11.129) ; v1(67.437,25.908) v1(67.437,27.377) ; v1(68,6) 68.709,6 70.739,3.97 v1(70.739,3.556) ; v1(68.707,7.62) 70.104,7.62 v1(70.358,7.366) ; v1(73.5,27.377) 74,26.877 v1(74,26) ; v2(77.343,29.464) 77.851,28.956 v2(80.01,28.956) 82.169,28.956 v2(82.233,29.019) ; v1(79.502,27.377) 80,26.879 v1(80,26)
  Top Layer w0.6: v2(14.605,13.081) v2(16.383,13.081) ; v2(14.605,17.829) v2(16.383,17.829) ; v2(22.479,26.924) v2(22.479,26.035) 22.479,25.566 v2(22.479,25.146) v2(23.241,24.384) v2(24.13,24.384) v2(25.019,24.384) v2(25.908,24.384) v2(26.797,24.384) v2(27.686,24.384) v2(28.575,24.384) v2(29.464,24.384) v2(30.353,24.384) v2(31.242,24.384) v2(32.131,24.384) v2(33.02,24.384) 33.528,24.892 v2(33.528,25.146) v2(33.528,26.035) v2(33.528,26.924) v2(33.528,27.813) v2(33.528,28.702) v2(33.528,29.591) v2(33.528,30.48) v2(33.528,31.369) v2(33.528,32.258) v2(33.528,33.147) v2(33.528,34.036) v2(33.528,34.925) v2(33.528,35.814) v2(33.528,36.703) v2(33.528,37.592) 33.147,37.973 v2(32.639,37.973) v2(31.75,37.973) v2(30.861,37.973) v2(29.972,37.973) v2(29.083,37.973) v2(28.194,37.973) v2(27.305,37.973) v2(26.416,37.973) v2(25.527,37.973) v2(24.638,37.973) v2(23.749,37.973) ; v2@22.479,29.591 v2@22.479,34.049 ; v2(23.622,21.971) v2(24.638,21.971) v2(25.527,21.971) v2(26.416,21.971) v2(27.305,21.971) v2(28.194,21.971) v2(29.083,21.971) v2(29.972,21.971) v2(30.861,21.971) v2(31.75,21.971) v2(32.639,21.971) v2(33.528,21.971) v2(34.417,21.971) v2(35.306,21.971) v2(36.195,21.971) v2(37.084,21.971) v2(37.973,21.971) v2(38.862,21.971) v2(39.751,21.971) v2(40.767,21.971) v2(41.656,21.971) v2(42.545,21.971) v2(43.434,21.971) v2(44.323,21.971) v2(45.212,21.971) v2(46.101,21.971) v2(46.99,21.971) v2(47.879,21.971) v2(48.768,21.971) v2(49.657,21.971) v2(50.546,21.971) v2(51.435,21.971) v2(52.324,21.971) v2(54.102,21.971) v2(54.991,21.971) v2(56.515,21.971) v2(57.531,21.971) ; C20.1@25.373,18.657 C20.1 ; v2(25.527,19.304) 25.527,18.565 C20.1 ; v2(25.908,17.526) 25.908,18.122 C20.1 ; v2(27.371,14.968) 27.922,14.968 28.067,15.113 v2(28.575,15.113) v2(29.464,15.113) v2(30.353,15.113) v2(31.242,15.113) v2(32.131,15.113) v2(33.02,15.113) v2(33.909,15.113) v2(34.798,15.113) v2(35.687,15.113) v2(36.576,15.113) v2(37.465,15.113) v2(38.354,15.113) v2(39.243,15.113) v2(40.132,15.113) v2(41.021,15.113) v2(41.91,15.113) v2(42.799,15.113) v2(43.688,15.113) v2(44.577,15.113) v2(45.466,15.113) v2(46.355,15.113) v2(47.244,15.113) v2(48.133,15.113) v2(49.022,15.113) v2(49.911,15.113) v2(50.8,15.113) v2(51.689,15.113) v2(52.578,15.113) v2(53.467,15.113) v2(54.483,15.113) 55.499,15.113 v2(55.626,15.24) v2(56.388,16.002) 56.769,16.383 v2(56.769,16.891) v2(56.769,17.78) v2(56.769,18.669) v2(56.769,19.558) ; v2(27.432,20.447) v2(28.321,20.447) v2(29.21,20.447) v2(30.099,20.447) v2(30.988,20.447) v2(31.877,20.447) v2(32.766,20.447) v2(33.655,20.447) v2(34.544,20.447) v2(35.433,20.447) v2(36.322,20.447) v2(37.211,20.447) v2(38.1,20.447) v2(38.989,20.447) v2(39.878,20.447) v2(40.767,20.447) v2(41.656,20.447) v2(42.545,20.447) v2(43.434,20.447) v2(44.323,20.447) v2(45.212,20.447) v2(46.101,20.447) v2(46.99,20.447) v2(47.879,20.447) v2(48.768,20.447) v2(49.657,20.447) v2(50.546,20.447) v2(51.435,20.447) v2(52.324,20.447) v2(53.213,20.447) v2(54.102,20.447) v2(54.991,20.447) ; v2(28.956,16.637) v2(29.845,16.637) v2(30.734,16.637) v2(31.623,16.637) v2(32.512,16.637) v2(33.401,16.637) v2(34.29,16.637) v2(35.179,16.637) v2(36.068,16.637) v2(36.957,16.637) v2(37.846,16.637) v2(38.735,16.637) v2(39.624,16.637) v2(40.513,16.637) v2(41.402,16.637) v2(42.291,16.637) v2(43.18,16.637) v2(44.069,16.637) v2(44.958,16.637) v2(45.847,16.637) v2(46.736,16.637) v2(47.625,16.637) v2(48.514,16.637) v2(49.403,16.637) v2(50.292,16.637) v2(51.181,16.637) v2(52.07,16.637) v2(52.959,16.637) v2(53.975,16.637) 54.737,16.637 v2(54.991,16.891) v2(54.991,17.78) v2(54.991,18.669) v2(54.991,19.558) ; v2(58.801,20.955) 58.293,20.447 v2(57.912,20.447) v2(56.769,20.447) ; v1(67,36) 68.326,34.674 v2(68.326,34.544) 68.326,33.829 C9.2@68.5,33.655 ; v2(70.72,41.718) 70.27,42.168 R12.1 70.27,42.668 v2(70.72,43.118) ; v2(71.17,34.359) 70.659,34.869 v2(70.659,34.925) v2(70.659,35.687) v2(70.659,36.449) v2(70.659,37.211) v2(70.659,37.973) v2(71.421,37.973) v2(72.183,37.973) v2(72.945,37.973) v2(73.707,37.973) v2(74.469,37.973) v2(75.231,37.973) v2(75.231,37.211) v2(75.231,36.449) v2(75.231,35.687) v2(75.231,34.925) ; v2(73.66,21.717) v2(73.66,20.574) v2(73.66,19.304) 73.66,19.05 v2(72.898,18.288) 72.136,17.526 v2(72.136,17.272) v2(72.136,16.002) v2(72.136,14.732) v2(72.136,13.462) v2(72.898,12.7) 73.66,11.938 v2(74.422,11.938) v2(75.946,11.938) v2(76.962,12.954) v2(77.978,13.97) v2(78.994,14.986) 79.502,15.494 v2(79.502,16.002) v2(79.502,17.272) v2(79.502,18.796) 79.502,19.05 v2(78.74,19.812) 78.486,20.066 v2(77.216,20.066) 76.962,20.066 v2(76.2,20.828) v2(76.2,21.844) ; v2(54.991,19.558) v2(56.769,19.558) ; v2(54.991,19.558) v2(54.991,20.447) ; v2(54.991,20.447) v2(56.769,20.447) ; v2(56.769,19.558) v2(56.769,20.447)
  Top Layer w0.9: C7.1 15.748,25.908 16.129,26.289 ; U3.9@18.161,26.289 16.129,26.289 ; U3.9@18.288,26.416 17.663,26.416 16.256,26.416 16.129,26.289
  other v1: 2,2 4,2 6,2 8,2 10,2 12,2 14,2 16,2 18,2 20,2 22,2 24,2 26,2 28,2 30,2 32,2 34,2 36,2 38,2 40,2 42,2 44,2 46,2 48,2 50,2 52,2 54,2 56,2 58,2 60,2 62,2 64,2 76,2 3,4 5,4 7,4 9,4 11,4 13,4 15,4 17,4 19,4 21,4 23,4 25,4 27,4 29,4 31,4 33,4 35,4 37,4 39,4 41,4 43,4 45,4 47,4 49,4 51,4 53,4 55,4 57,4 59,4 61,4 63,4 65,4 89,4 19.939,5.461 23.749,5.461 26.289,5.461 65.703,5.703 2,6 4,6 6,6 8,6 10,6 12,6 14,6 16,6 18,6 22,6 28,6 30,6 32,6 34,6 36,6 38,6 40,6 42,6 44,6 46,6 48,6 50,6 52,6 54,6 56,6 58,6 60,6 62,6 64,6 72,6 74,6 78,6 82,6 84,6 86,6 90,6 66.791,7.791 3,8 9,8 11,8 13,8 15,8 17,8 29,8 31,8 33,8 35,8 37,8 39,8 41,8 43,8 45,8 47,8 49,8 57,8 59,8 61,8 63,8 75,8 77,8 79,8 81,8 87,8 89,8 91,8 64.389,9.144 61.703,9.703 10,10 12,10 14,10 16,10 28,10 30,10 32,10 34,10 36,10 38,10 40,10 42,10 44,10 46,10 48,10 50,10 52,10 56,10 58,10 60,10 70,10 74,10 76,10 78,10 82,10 84,10 86,10 90,10 79.086,11.629 62.791,11.791 3,12 11,12 13,12 15,12 17,12 29,12 31,12 33,12 35,12 37,12 41,12 45,12 49,12 51,12 53,12 57,12 59,12 71,12 73,12 77,12 81,12 87,12 89,12 91,12 60.706,13.208 2,14 4,14 6,14 12,14 14,14 28,14 30,14 32,14 34,14 36,14 38,14 40,14 42,14 44,14 46,14 48,14 50,14 52,14 54,14 56,14 58,14 66,14 70,14 82,14 84,14 86,14 90,14 79.848,14.588 65,16 67,16 69,16 71,16 87,16 89,16 91,16 2,18 4,18 12,18 18,18 20,18 36,18 38,18 40,18 42,18 44,18 46,18 48,18 50,18 52,18 54,18 58,18 68,18 70,18 72,18 80,18 82,18 84,18 86,18 90,18 65,20 67,20 69,20 71,20 73,20 87,20 89,20 91,20 4.191,20.447 8,22 12,22 14,22 68,22 70,22 72,22 78,22 80,22 90,22 4.191,22.479 3,24 5,24 7,24 9,24 11,24 13,24 17,24 35,24 37,24 43,24 49,24 89,24 2,26 4,26 6,26 8,26 10,26 12,26 14,26 20,26 36,26 48,26 52,26 66,26 70,26 72,26 76,26 78,26 82,26 84,26 86,26 88,26 3,28 5,28 7,28 9,28 11,28 13,28 15,28 2,30 4,30 6,30 8,30 14,30 16,30 18,30 20,30 28,30 30,30 32,30 46,30 48,30 52,30 62,30 70,30 80,30 88,30 3,32 5,32 7,32 9,32 11,32 13,32 15,32 17,32 19,32 35,32 37,32 39,32 85,32 89,32 91,32 2,34 4,34 6,34 10,34 12,34 18,34 36,34 38,34 52,34 60,34 78,34 84,34 86,34 90,34 3,36 5,36 11,36 35,36 37,36 39,36 41,36 43,36 79,36 81,36 89,36 91,36 37.973,37.084 2,38 4,38 6,38 8,38 10,38 12,38 16,38 18,38 36,38 40,38 42,38 46,38 48,38 50,38 54,38 56,38 62,38 66,38 76,38 78,38 84,38 86,38 90,38 70.612,39.243 73.025,39.243 75.184,39.243 7,40 9,40 11,40 13,40 15,40 17,40 19,40 23,40 29,40 31,40 33,40 35,40 37,40 39,40 43,40 47,40 49,40 53,40 57,40 61,40 65,40 67,40 79,40 81,40 89,40 2,42 4,42 6,42 8,42 10,42 12,42 14,42 16,42 18,42 24,42 26,42 28,42 30,42 32,42 34,42 62,42
  other v2: 0.5,0.5 2.5,0.5 4.5,0.5 6.5,0.5 8.5,0.5 10.5,0.5 12.5,0.5 14.5,0.5 16.5,0.5 18.5,0.5 20.5,0.5 22.5,0.5 24.5,0.5 26.5,0.5 28.5,0.5 30.5,0.5 32.5,0.5 34.5,0.5 36.5,0.5 38.5,0.5 40.5,0.5 42.5,0.5 44.5,0.5 46.5,0.5 48.5,0.5 50.5,0.5 52.5,0.5 54.5,0.5 56.5,0.5 58.5,0.5 60.5,0.5 62.5,0.5 64.5,0.5 66.5,0.5 68.5,0.5 70.5,0.5 72.5,0.5 74.5,0.5 76.5,0.5 78.5,0.5 80.5,0.5 82.5,0.5 84.5,0.5 86.5,0.5 88.5,0.5 89.5,1.5 0.5,2 89.955,3.17 0.5,3.5 90.968,4.135 0.5,5 91.943,5.262 0.5,6.5 91.97,6.67 0.5,8 91.996,8.078 7.747,8.89 8.636,9.144 92.022,9.486 9.017,10.033 92.049,10.894 9.017,11.049 8.636,11.746 92,12.5 19.304,13.589 92,14 92,15.5 92,17 8.636,18.288 92,18.5 11.43,18.796 9.017,18.951 9.017,19.967 92,20 8.636,20.856 0.5,21 7.747,21.11 92,21.5 0.5,22.5 43.908,23.797 0.5,24 0.5,25.5 15.757,25.871 0.5,27 0.5,28.5 22.489,29.477 0.5,30 22.489,30.366 21.082,30.48 22.489,31.255 21.082,31.369 0.5,31.5 23.876,31.496 24.892,31.496 25.908,31.496 22.489,32.144 21.082,32.258 92,32.5 23.876,32.766 24.892,32.766 25.908,32.766 0.5,33 22.489,33.033 21.082,33.147 22.489,34.049 21.082,34.163 0.5,34.5 92,34.5 0.5,36 31.02,36.17 92,36.5 0.5,37.5 91.207,37.993 0.5,39 90.169,39.031 0.5,40.5 89.5,40.5 0.5,42 89.5,42 0.521,43.503 89.5,43.5 2,44.5 4,44.5 6,44.5 8,44.5 10,44.5 12,44.5 28.5,44.5 30.5,44.5 32.5,44.5 34.5,44.5 36.5,44.5 38.5,44.5 40.5,44.5 42.5,44.5 44.5,44.5 46.5,44.5 48.5,44.5 50.5,44.5 52.5,44.5 54.5,44.5 56.5,44.5 58.5,44.5 60.5,44.5 62.5,44.5 64.5,44.5 66.5,44.5 68.5,44.5 70.5,44.5 72.5,44.5 74.5,44.5 76.5,44.5 78.5,44.5 80.5,44.5 82.5,44.5 84.5,44.5 86.5,44.5 88.5,44.5
ILIM: R1.2 U3.4 | length 1.4
  Top Layer w0.3: R1.2 17.313,28.446 U3.4
INDICATOR: D2.1 R2.2 | length 1.6
  Top Layer w0.6: R2.2 D2.1
RST: C12.2 P5.5 R3.1 SW1.2 U4.1 | length 35.5
  Top Layer w0.45: C12.2@44.878,23.052 49.893,23.052 ; R3.1 50.466,23.625 ; 50.478,23.601 51.026,23.052 ; 51.051,23.028 51.026,23.052 ; U4.1 52.69,23.052 51.026,23.052 ; 49.893,23.052 50.466,23.052 ; 49.893,23.052 50.466,23.625 ; 50.466,23.052 51.026,23.052 ; 50.466,23.052 50.466,23.625
  Bottom Layer w0.203: P5.5 36.957,30.734 36.449,30.226 36.449,27.559 40.894,23.114 52.752,23.114 U4.1
RX_L: D6.1 R11.2 | length 1.7
  Top Layer w0.9: D6.1@25.916,8.39 R11.2
SW: C1.1 L1.1 U1.5
TX_L: D5.1 R10.2 | length 1.7
  Top Layer w0.9: R10.2 19.058,8.39 D5.1
"USB_RX (D1)": P3.2 R5.1 U4.3 U5.2 | length 73.2
  Top Layer w0.3: U5.2 22.931,19.907 R5.1 22.987,20.265 22.987,20.828 23.368,21.209 53.447,21.209 54.757,21.209 57.785,21.209 58.34,21.764 U4.3
  Bottom Layer w0.203: U4.3 58.34,25.32 58.928,25.908 61.468,25.908 62.148,25.228 62.148,15.068 69.596,7.62 P3.2
"USB_TX (D0)": P3.1 R4.1 U4.2 U5.15 | length 70.8
  Top Layer w0.203: U4.2 55.8,25.32 56.388,25.908 58.801,25.908 59.563,25.146 59.563,12.7 67.056,5.207 P3.1
  Top Layer w0.3: U5.15 26.97,15.819 R4.1 27.374,15.875 55.118,15.875 55.84,16.597 55.84,18.45 v2(55.845,18.455)
  Bottom Layer w0.3: U4.2 55.811,23.611 55.811,18.489 v2(55.845,18.455)
USBDM: R8.2 U5.7 | length 1.9
  Top Layer w0.3: R8.2 19.591,15.169 U5.7
USBDP: R7.2 U5.6 | length 1.9
  Top Layer w0.3: R7.2 19.575,15.819 U5.6
VBAT: D1.1 P1.2 | length 3.8
  Top Layer w1.6: D1.1 21.336,42.418 P1.2
  Bottom Layer w1.6: 21.336,42.418 P1.2
  other v2: 20.955,42.418 21.717,42.418
VBuck: C4.2 C5.2 C6.2 L1.2 U1.1 U3.8 | length 21.2
  Top Layer w0.203: v2(23.114,28.194) 24.114,28.194 C5.2 ; U1.1 v2(30.099,36.576) ; L1.2 L1.2@29.99,27.686
  Top Layer w0.3: 22.606,27.94 23.241,27.305 23.368,27.305
  Bottom Layer w0.203: v2(23.114,28.194) 22.098,28.194 21.823,28.469 21.823,36.555 22.297,37.029 29.773,37.029 cw(c29.773,36.703) 30.099,36.703 v2(30.099,36.576)
VCCIO: C20.2 D5.2 D6.2 R4.2 R5.2 U5.1 U5.8 U5.9 | length 50.4
  Top Layer w0.35: 20.869,14.019 20.507,13.657 ; U5.8 20.906,14.019 ; U5.9 21.582,13.843 21.082,13.843 ; 22.311,8.706 22.487,8.882 ; 22.487,8.374 22.487,8.882 ; 22.663,8.706 22.487,8.882 ; U5.1 23.581,18.319 C20.2 ; v2(25.019,17.399) 23.884,18.534 C20.2 ; v2(26.416,14.732) 27.178,13.97 27.178,7.493 26.67,6.985 18.288,6.985 17.907,7.366 17.907,12.319 18.288,12.7 19.55,12.7 20.507,13.657 ; R4.2 27.2,19.282 26.424,20.058 R5.2 23.796,19.374 C20.2 ; 20.507,13.657 cw(c20.532,13.631) 20.532,13.667 20.701,13.667 ; 20.701,13.667 20.906,13.667 ; 20.701,13.667 20.906,13.462 ; 20.906,13.462 20.906,13.667 ; 20.906,13.462 20.906,10.717 22.487,9.136 22.487,8.882 ; 20.906,13.667 20.906,14.019 ; 20.906,13.667 21.082,13.843 ; 20.906,14.019 21.082,13.843
  Top Layer w1: D5.2 22.487,8.374 D6.2
  Bottom Layer w0.35: v2(25.019,17.399) 25.019,16.129 v2(26.416,14.732)
VJACK: J2.1 U2.3 | length 0
  Bottom Layer w0.6: v2(15.494,34.036) v2@15.5,34.042
  other v2: 15.24,33.147 15.494,34.925 15.5,35.8 15.367,36.703
VUSB: C7.2 D4.1 J1.A4_B9 J1.B4_A9 U3.6 | length 37.2
  Top Layer w0.3: 17.963,24.313 U3.6
  Top Layer w0.6: J1.B4_A9 8.616,12.6 v2(8.619,12.603) 8.622,12.6 v2(9.371,12.6) v2(9.906,12.065) ; J1.A4_B9 v2(9.371,17.4) v2(9.906,17.935) 10.033,18.062 10.033,19.539 10.033,22.606 10.541,23.114 17.526,23.114 17.963,23.551 17.963,24.313
  Bottom Layer w0.6: v2(9.906,12.065) v2(9.371,12.6) 8.622,12.6 v2(8.619,12.603) 7.717,12.603 7.239,13.081 3.556,13.081 3.175,13.462 3.175,16.51 3.556,16.891 6.858,16.891 6.932,16.965 6.938,16.965 7.306,17.332 7.306,17.339 7.366,17.399 v2(9.371,17.4) v2(9.371,17.4) v2(9.906,17.935)
  other v2: 8.619,17.397
XTAL_N: C14.2 U4.10 X1.3 | length 12.1
  Top Layer w0.381: U4.10 75.104,22.606 75.104,19.812 75.612,19.304 78.152,19.304 78.66,18.796 78.66,17.78 C14.2 76.8,15.92 X1.3
XTAL_P: C13.2 U4.9 X1.1 | length 11.8
  Top Layer w0.381: U4.9 74.596,22.606 74.596,18.796 73.072,17.272 73.072,15.075 C13.2 X1.1@74.654,15.69
pads on no net: J1. J1.A8 J1.B8 J1.SH1 J1.SH2 J1.SH3 J1.SH4 U1. U3.1 U3.2 U5. U5.4 U5.11 U5.12 U5.16

## Polygon pours and split planes (outlines as drawn)
+5 on Top Layer "NONET_L-01_P-001" (solid, pour order 14): 18.669,23.703 19.939,22.098 18.613,22.098 18.613,22.535 18.669,22.591
GND on Top Layer "NONET_L-01_P-001" (solid, pour order 12): 18.034,34.163 18.317,34.446 27.657,34.446 27.813,34.29 27.813,33.528 27.686,33.401 26.924,33.401 26.797,33.274 26.797,29.591 26.289,29.083 20.574,29.083 18.034,31.623
VBuck on Top Layer "NONET_L-01_P-001" (solid, pour order 13): 19.05,25.146 19.05,25.273 19.177,25.4 20.32,25.4 20.701,25.781 20.701,28.067 21.209,28.575 23.114,28.575 23.495,28.194 23.495,27.813 23.241,27.559 21.463,27.559 21.463,24.892 21.209,24.638 19.177,24.638 19.05,24.765
SW on Top Layer "NONET_L-01_P-001" (solid, pour order 11): 31.369,32.766 31.623,33.02 31.623,34.417 31.75,34.544 32.639,34.544 32.766,34.417 32.766,33.02 32.131,32.385
SW on Top Layer "NONET_L-01_P-001" (solid, pour order 8): 27.305,32.766 27.559,33.147 27.813,33.147 28.067,33.401 28.067,34.29 28.194,34.544 28.702,34.544 28.829,34.417 28.829,33.401 29.337,32.893 32.258,32.893 32.385,32.766 32.385,30.861 32.131,30.48 27.686,30.48 27.305,30.861
VBuck on Top Layer "NONET_L-01_P-001" (solid, pour order 9): 23.241,28.956 32.258,28.956 32.639,28.575 32.639,26.416 32.258,25.908 23.241,25.908 22.987,26.289 22.987,28.575
+12 on Top Layer "NONET_L-01_P-001" (solid, pour order 6): 18.034,37.338 18.923,38.227 22.225,38.227 23.114,37.338 28.321,37.338 28.829,36.83 28.829,35.687 28.321,35.179 18.542,35.179 18.034,35.687
VJACK on Top Layer "NONET_L-01_P-001" (solid, pour order 2): 12.573,36.957 13.208,37.592 14.986,37.592 17.272,35.306 17.272,34.671 15.24,32.639 13.208,32.639 12.573,33.274 12.573,35.306 12.573,33.274 12.573,35.306
GND on Top Layer "GND_L01_P001" (solid, pour order 1): 7.112,17.935 7.193,17.854 9.063,17.854 9.525,18.316 9.525,21.237 9.017,21.745 7.112,21.745 6.696,21.329 6.696,20.637 6.985,20.348 8.255,20.348 8.509,20.094 8.509,18.697 8.382,18.57 7.239,18.57 7.112,18.443
GND on Top Layer "GND_L01_P000" (solid, pour order 0): 7.112,12.065 7.193,12.146 9.063,12.146 9.525,11.684 9.525,8.763 9.017,8.255 7.112,8.255 6.696,8.671 6.696,9.363 6.985,9.652 8.255,9.652 8.509,9.906 8.509,11.303 8.382,11.43 7.239,11.43 7.112,11.557
GND on Bottom Layer "GND_L02_P017" (solid, remove dead copper, pour order 17): 0,0 90,0 90,2.5 92.5,5 92.5,37.5 90,40 90,45 0,45
VJACK on Bottom Layer "NONET_L-01_P-001" (solid, pour order 5): 13.335,36.957 13.462,36.957 13.716,37.211 15.367,37.211 15.875,36.703 15.875,33.274 15.367,32.766 13.589,32.766 13.335,33.02

## Other copper
Top Layer:
  rectangle net GND: 0,0 1,9.5
  region net GND: 0,0 90,0 90,2.5 92.5,5 92.5,22.733 91.5,22.733 91.5,5.5 89,3 89,1 0,1
  region net GND: 92.5,32 92.5,37.5 90,40 90,45 27,45 27,44 89,44 89,39.5 91.5,37 91.5,32
  region net GND: 0,20.5 0,45 13,45 13,44 1,44 1,20.5
Bottom Layer:
  rectangle net GND: 22.106,14.994 23.106,15.994
  rectangle net GND: 0,0 1,9.5
  pour cut-out: 63.42,24.925 60.88,24.925 60.88,22.319 63.42,22.319
  region net GND: 92.5,32 92.5,37.5 90,40 90,45 27,45 27,44 89,44 89,39.5 91.5,37 91.5,32
  region net GND: 0,0 90,0 90,2.5 92.5,5 92.5,22.733 91.5,22.733 91.5,5.5 89,3 89,1 0,1
  region net GND: 0,20.5 0,45 13,45 13,44 1,44 1,20.5

## Silkscreen, mask and mechanical layers (free items; w line width, h text height)
Top Overlay:
  lines w0.203: 71.145,35.077 71.145,37.336 ; 71.628,34.544 74.745,34.544 ; 23.114,24.892 23.114,37.211 32.893,37.211 32.893,24.892 23.114,24.892
  lines w0.762: 35.306,42.5 35.306,39.878 36.195,38.989 64.897,38.989 65.786,39.878 65.786,42.5 ; 39.751,39.116 40.386,39.751 41.021,39.116 ; 40.386,39.243 40.386,42.5 ; 44.831,39.116 45.466,39.751 46.101,39.116 ; 45.466,39.116 45.466,42.5 ; 49.276,37.465 51.943,37.465 ; 49.911,36.449 51.181,36.449 ; 49.911,39.116 50.546,39.751 51.181,39.116 ; 50.546,37.592 50.546,38.989 ; 50.546,39.37 50.546,42.5 ; 54.991,39.116 55.626,39.751 56.261,39.116 ; 55.626,39.243 55.626,42.5 ; 60.071,39.116 60.706,39.751 61.341,39.116 ; 60.706,39.243 60.706,42.5
  text "6V to 12V" at 26.988,42.667 h1.52
  text "GND" at 13.494,42.561 h2.03
  text "Vin" at 22.638,42.561 h2.03
  text "A5" at 36.539,40.259 h1.02
  text "A4" at 41.619,40.259 h1.02
  text "A3" at 46.699,40.259 h1.02
  text "A2" at 51.779,40.259 h1.02
  text "A1" at 56.859,40.259 h1.02
  text "A0" at 61.939,40.259 h1.02
  text "AREF" at 67.019,40.259 h1.02
  text "D13" at 76.073,40.259 h1.02
  text "D12" at 78.613,40.259 h1.02
  text "D11~" at 81.153,40.259 h1.02
  text "D10~" at 83.693,40.259 h1.02
  text "D9~" at 86.233,40.259 h1.02
  text "+12V" at 1.175,39.767 h2.03
  text "Reverse-Polarity Protection" at 22.748,39.624 h1.02
  text "BLINK" at 70.351,39.386 h1.52
  text "GND" at 35.973,37.1 h2.03
  text "AVCC Filter" at 75.664,34.529 h2.03
  text "RESET" at 45.823,33.409 h1.27
  text "ICSP" at 38.82,32.909 h1.52
  text "RST" at 36.61,32.06 h1.02
  text "SCK" at 39.189,32.06 h1.02
  text "MISO" at 41.574,32.06 h1.02
  text "+5V" at 89.828,29.916 h1.52
  text "JLCJLCJLCJLC" at 69.749,27.946 h0.8
  text "Power Auto-Switching" at 9.406,26.223 h1.02
  text "GND" at 36.608,25.908 h1.02
  text "MOSI" at 39.055,25.908 h1.02
  text "+5V" at 41.729,25.908 h1.02
  text "BUCK" at 27.813,24.892 h2.03
  text "GND" at 89.815,22.876 h1.52
  text "USB" at 1.079,20.463 h2.03
  text "ATMEGA328" at 59.967,20.082 h1.52
  text "FTDI" at 29.972,17.288 h2.03
  text "Better" at 42.545,10.287 h2.54
  text "16MHz" at 77.556,10.102 h2.03 r45
  text "The" at 38.608,9.549 h1.27
  text "Arduino" at 38.862,7.493 h1.52
  text "UNO" at 49.403,7.239 h2
  text "RX" at 18.288,5.477 h2.03
  text "TX" at 23.114,5.477 h2.03
  text "D0" at 65.749,3.855 h1.02
  text "D1" at 68.289,3.855 h1.02
  text "D2" at 70.829,3.855 h1.02
  text "D3" at 73.369,3.855 h1.02
  text "D5" at 75.909,3.855 h1.02
  text "D5" at 78.449,3.855 h1.02
  text "D6" at 80.989,3.855 h1.02
  text "D7" at 83.529,3.855 h1.02
  text "D8" at 86.069,3.855 h1.02
  text "Designed By:" at 1.296,2.354 h0.51
  text "Hatim Saad" at 1.345,1.405 h0.51
Board Shape:
  the board outline again, w0.025